# EAGLE board inktime_v6 (EAGLE 9.7.0)
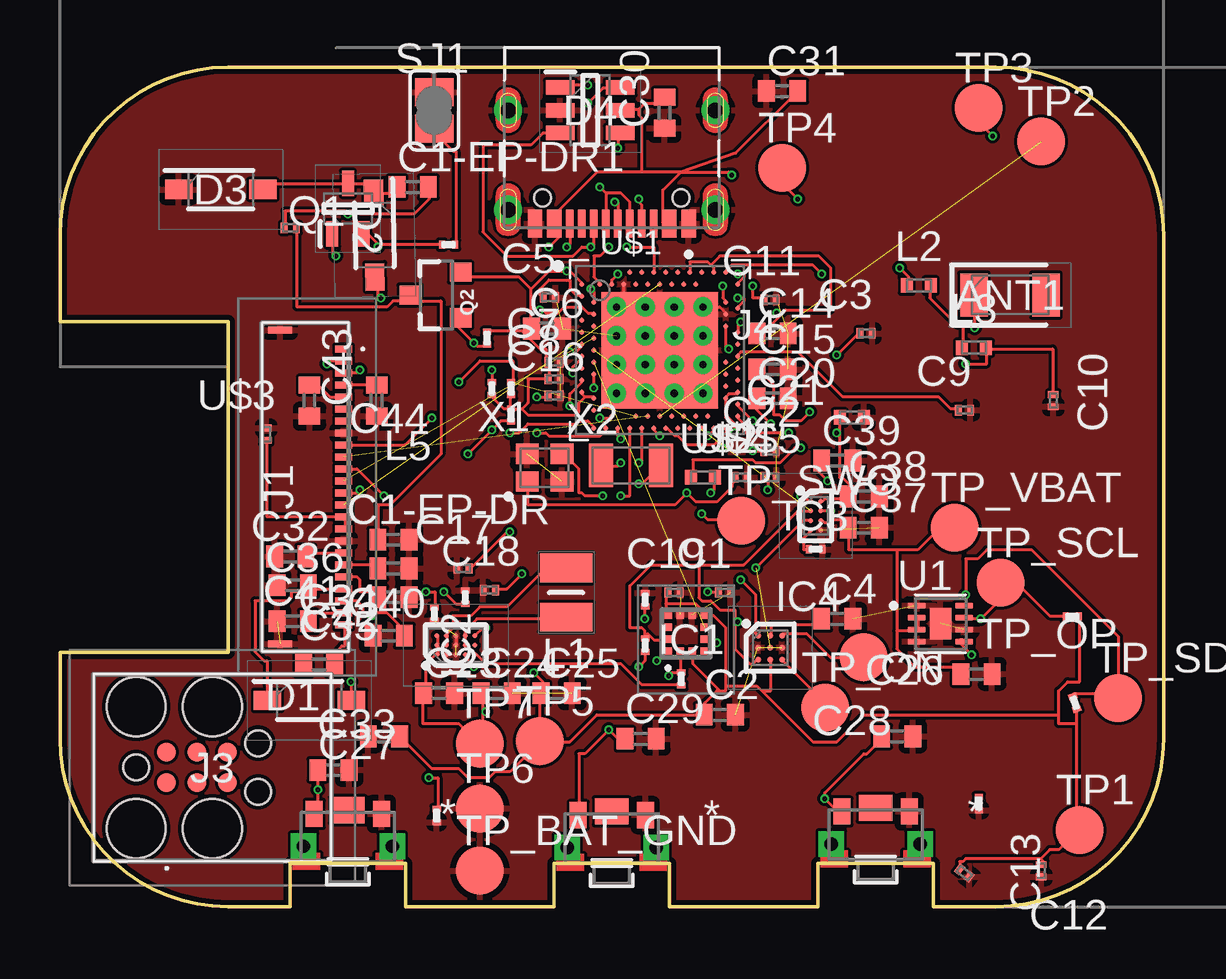
[diagram p0: board, top side]
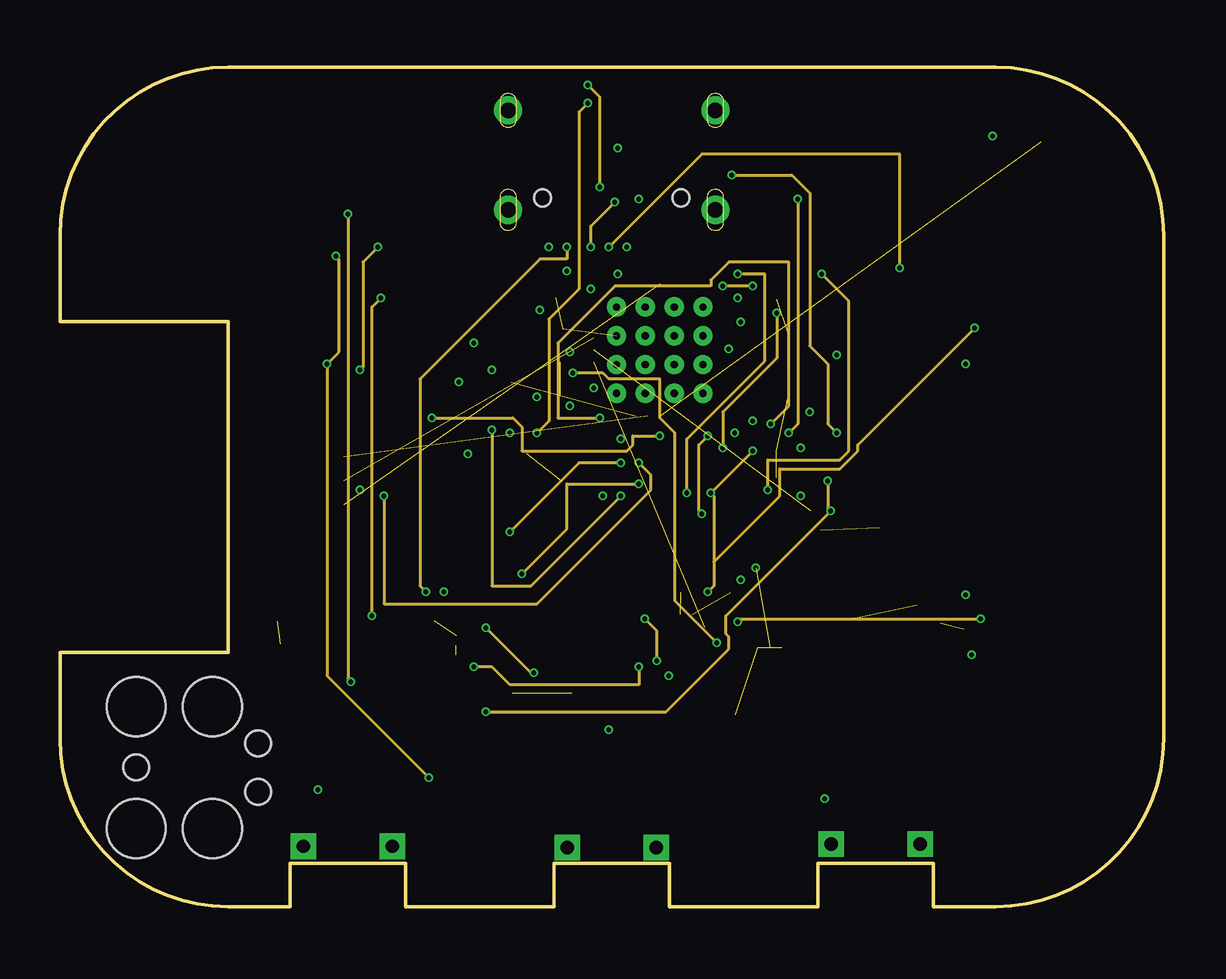
[diagram p1: board, inner layer Route2]
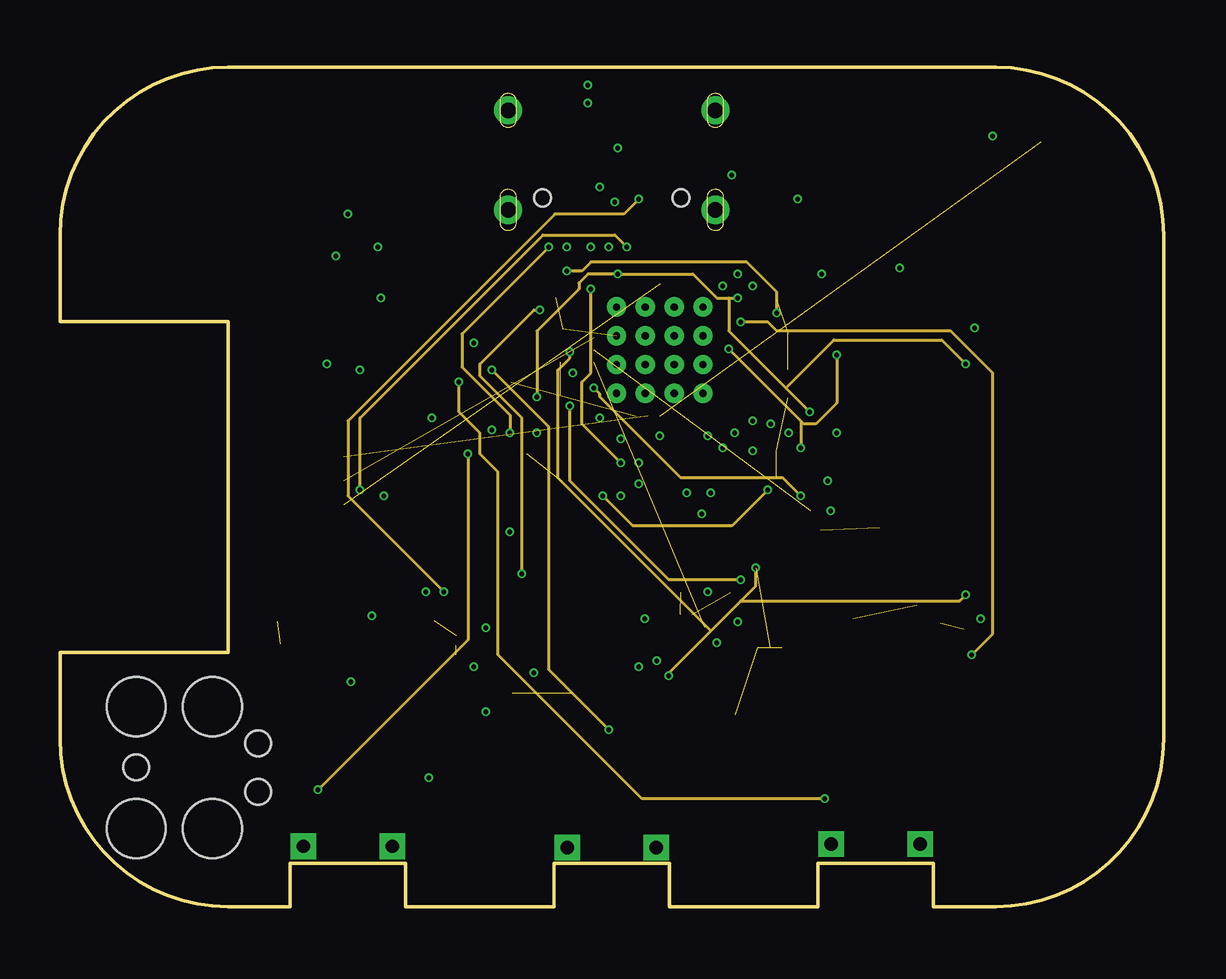
[diagram p2: board, inner layer Route15]
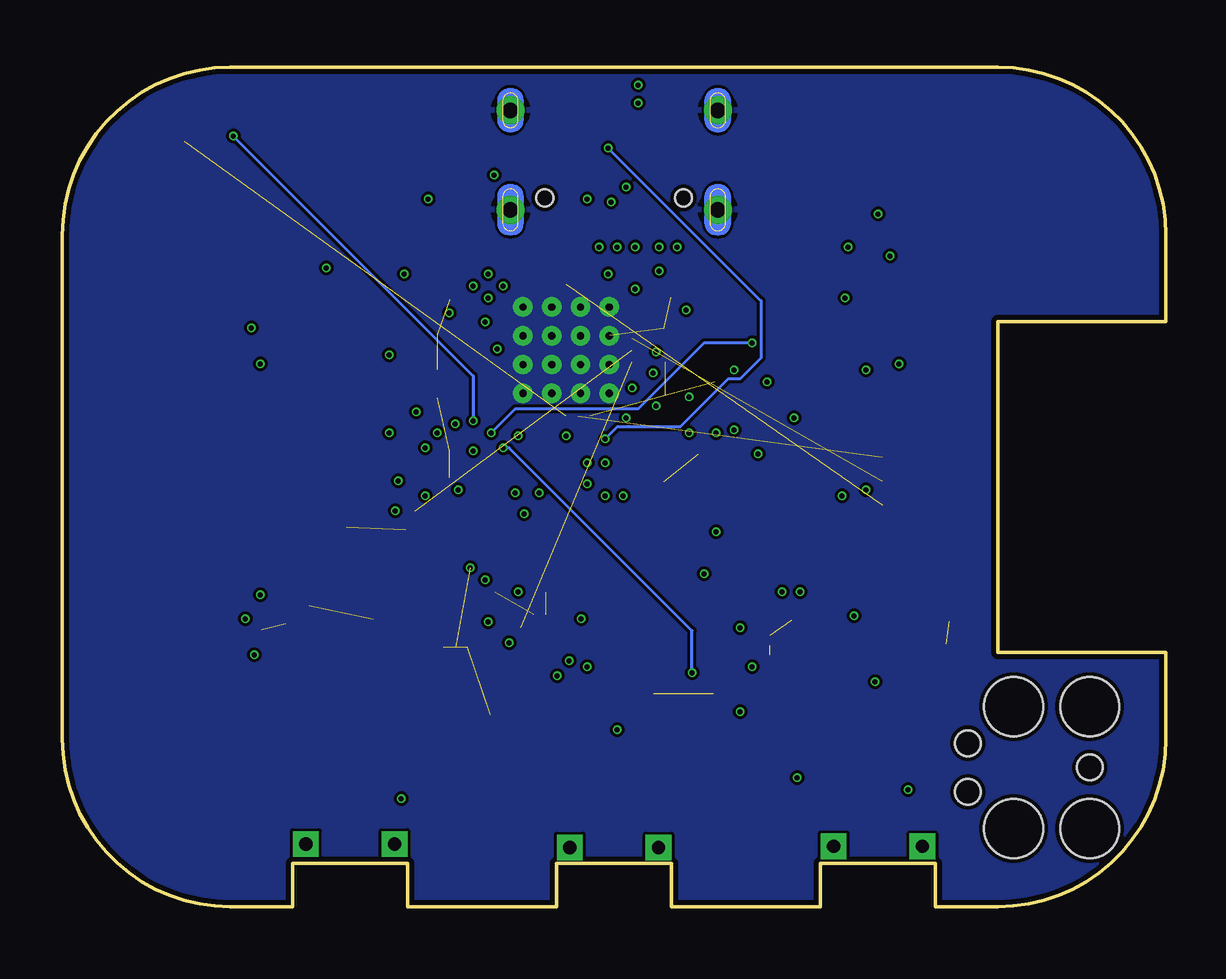
[diagram p3: board, bottom side, seen from below]

Size 46 x 35 mm. Coordinates in mm from the lower left corner, seen from the top.
Outline: 39,0 36.4,0 36.4,1.8 31.6,1.8 31.6,0 25.4,0 25.4,1.8 20.6,1.8 20.6,0 14.4,0 14.4,1.8 9.6,1.8 9.6,0 7,0 arc-90 0,7 0,10.6 7,10.6 7,24.4 0,24.4 0,28 arc-90 7,35 39,35 arc-90 46,28 46,7 arc-90 39,0
Copper layers (1+2*15+16): Top 0.035mm / dielectric 1.6mm / Route2 0.035mm / dielectric 0.15mm / Route15 0.035mm / dielectric 0.2mm / Bottom 0.035mm
Design rules "jlcpcb-2layers.dru *": minimum track width 5mil, minimum drill 0.2mm, track to track 5mil, track to pad 5mil, pad to pad 5mil, via to via 5mil, smd to smd 5mil, copper to edge 0.2mm, drill to drill 6mil, minimum pad ring 10mil, minimum via ring 3mil, stop-mask expansion 4mil, vias tented up to drill 999mm, thermal gap 10mil

## Footprints (pad centres in the part's own frame; a part is rotated, then mirrored left to right if it is on the bottom)
2450AT18B100E_ANTC3216X140N = smd 1.15 x 1.8: 1 -1.5,0; 2 1.5,0
NORDIC_NRF_3_RESC0201_L = smd 0.28 x 0.43: 1 -0.255,0; 2 0.255,0
ESP32_C6_LIBRARY_1_ESP32_WROVER_EAGLE-LTSPICE_C0402 = smd 0.7 x 0.9: 1 -0.65,0; 2 0.65,0
NORDIC_NRF_3_RESC0402_L = smd 0.5 x 0.6: 1 -0.5,0; 2 0.5,0
ESP32_C6_LIBRARY_5_SOD3716X135N = smd 1.15 x 0.8: 1 -1.75,0; 2 1.75,0
ESP32_C6_LIBRARY_3_SOT95P280X145-6N = smd 1.2 x 0.6: 1 -1.25,0.95; 2 -1.25,0; 3 -1.25,-0.95; 4 1.25,-0.95; 5 1.25,0; 6 1.25,0.95
BMA423_BMA423 = smd 0.3 x 0.35: 1 -0.75,-0.775; 2 -0.25,-0.775; 3 0.25,-0.775; 4 0.75,-0.775; 7 0.75,0.775; 8 0.25,0.775; 9 -0.25,0.775; 10 -0.75,0.775 | smd 0.35 x 0.3: 5 0.775,-0.25; 6 0.775,0.25; 11 -0.775,0.25; 12 -0.775,-0.25
RT6160AWSC_BGA15C40P3X5_140X230X60 = smd 0.216 x 0.216: A1 -0.4,0.8; A2 0,0.8; A3 0.4,0.8; B1 -0.4,0.4; B2 0,0.4; B3 0.4,0.4; C1 -0.4,0; C2 0,0; C3 0.4,0; D1 -0.4,-0.4; D2 0,-0.4; D3 0.4,-0.4; E1 -0.4,-0.8; E2 0,-0.8; E3 0.4,-0.8
BQ25180YBGR_BGA8C40P2X4_100X155X50 = smd 0.2 x 0.2: A1 -0.2,0.6; A2 0.2,0.6; B1 -0.2,0.2; B2 0.2,0.2; C1 -0.2,-0.2; C2 0.2,-0.2; D1 -0.2,-0.6; D2 0.2,-0.6
DRV2605YZFR_BGA9C50P3X3_144X144X62 = smd 0.25 x 0.25: A1 -0.5,0.5; A2 0,0.5; A3 0.5,0.5; B1 -0.5,0; B2 0,0; B3 0.5,0; C1 -0.5,-0.5; C2 0,-0.5; C3 0.5,-0.5
503480-2400_5034802400 = smd 0.3 x 0.7: 1 -5.75,1.525; 2 -5.25,1.525; 3 -4.75,1.525; 4 -4.25,1.525; 5 -3.75,1.525; 6 -3.25,1.525; 7 -2.75,1.525; 8 -2.25,1.525; 9 -1.75,1.525; 10 -1.25,1.525; 11 -0.75,1.525; 12 -0.25,1.525; 13 0.25,1.525; 14 0.75,1.525; 15 1.25,1.525; 16 1.75,1.525; 17 2.25,1.525; 18 2.75,1.525; 19 3.25,1.525; 20 3.75,1.525; 21 4.25,1.525; 22 4.75,1.525; 23 5.25,1.525; 24 5.75,1.525 | smd 0.3 x 1: MP1 -6.54,-1.125; MP2 6.54,-1.125
TC2030-IDC_TC2030IDC = smd 0.783 x 0.783: 1 -0.953,-0.635; 2 -0.953,0.635; 3 0.317,-0.635; 4 0.317,0.635; 5 1.588,-0.635; 6 1.588,0.635 | hole 2.451: -2.223,-2.54; -2.223,2.54; 0.952,-2.54; 0.952,2.54 | hole 1.067: -2.223,0; 2.857,-1.016; 2.857,1.016
KH-TYPE-C-16P_KINGHELM_KH-TYPE-C-16P = smd 0.6 x 1.15: A1_B12 -3.2,4.725; A4_B9 -2.4,4.725; A9_B4 2.4,4.725; A12_B1 3.2,4.725 | smd 0.3 x 1.15: A5 -1.25,4.725; A6 -0.25,4.725; A7 0.25,4.725; A8 1.25,4.725; B5 1.75,4.725; B6 0.75,4.725; B7 -0.75,4.725; B8 -1.75,4.725 | drill 0.65 pad 1.05: SH1 -4.32,0; SH2 4.32,0; SH3 -4.32,4.15; SH4 4.32,4.15 | hole 0.7: -2.89,3.65; 2.89,3.65
MLP2016SR47MT0S1_INDC2016X100N = smd 1.2 x 2.2: 1 -1.028,0; 2 1.028,0
NORDIC_NRF_2_RESC0402_L = smd 0.5 x 0.6: 1 -0.5,0; 2 0.5,0
NORDIC_NRF_2_RESC0201_L = smd 0.28 x 0.43: 1 -0.255,0; 2 0.255,0
ESP32_C6_LIBRARY_6_SOT65P210X110-3N = smd 1.05 x 0.5: 1 -1.05,0.65; 2 -1.05,-0.65; 3 1.05,0
ESP32_C6_LIBRARY_4_ESP32_C6_LIBRARY_4_ESP32_C6_LIBRARY_4_ESP32_C6_LIBRARY_4_ESP32_WROVER_SPARKFUN-DISCRETESEMI_SOT23-3 = smd 0.8 x 0.9: 1 -0.95,-1; 2 0.95,-1; 3 0,1.1
CPF0201D7K68C1_0201 = smd 0.35 x 0.25: 1 0,0.275; 2 0,-0.275
ESP32_C6_LIBRARY_7_JUMPER_SJ = smd 1.168 x 1.6: 1 -0.762,0; 2 0.762,0
2025-10-22_07-23-44_LIBRARY_SW_EVP-AKE31A_PAN = smd 0.711 x 1.092: 1 -1.4,-0.972; 2 1.4,-0.972 | drill 0.559 pad 0.914 square: 3 -1.848,0.381; 4 1.848,0.381 | smd 1.397 x 1.092: 5 0,-1.124
HECTOR_WATCH_1_TP20R = smd 2 x 2: TP 0,0
ESP32_C6_LIBRARY_SON50P200X200X80-9N = smd 0.76 x 0.27: 1 -0.985,0.75; 2 -0.985,0.25; 3 -0.985,-0.25; 4 -0.985,-0.75; 5 0.985,-0.75; 6 0.985,-0.25; 7 0.985,0.25; 8 0.985,0.75 | smd 0.9 x 1.3: 9 0,0
NORDIC_NRF_4_AQFN50P700X700X85_HS-74N = smd 4.85 x 4.85: P$74 0,0 | drill 0.3 pad 0.6: P$75 -1.8,1.8; P$76 -0.6,1.8; P$77 0.6,1.8; P$78 1.8,1.8; P$79 -1.8,0.6; P$80 -0.6,0.6; P$81 0.6,0.6; P$82 1.8,0.6; P$83 -1.8,-0.6; P$84 -0.6,-0.6; P$85 0.6,-0.6; P$86 1.8,-0.6; P$87 -1.8,-1.8; P$88 -0.6,-1.8; P$89 0.6,-1.8; P$90 1.8,-1.8 | smd 0.2 x 0.2: P$A8 -1.25,3.25; P$A10 -0.75,3.25; P$A12 -0.25,3.25; P$A14 0.25,3.25; P$A16 0.75,3.25; P$A18 1.25,3.25; P$A20 1.75,3.25; P$A22 2.25,3.25; P$A23 2.75,3.25; P$AA24 3.25,-2.25; P$AB2 -2.75,-2.5; P$AC5 -2,-2.75; P$AC9 -1,-2.75; P$AC11 -0.5,-2.75; P$AC13 0,-2.75; P$AC15 0.5,-2.75; P$AC17 1,-2.75; P$AC19 1.5,-2.75; P$AC21 2,-2.75; P$AC24 3.25,-2.75; P$AD2 -2.75,-3.25; P$AD4 -2.25,-3.25; P$AD6 -1.75,-3.25; P$AD8 -1.25,-3.25; P$AD10 -0.75,-3.25; P$AD12 -0.25,-3.25; P$AD14 0.25,-3.25; P$AD16 0.75,-3.25; P$AD18 1.25,-3.25; P$AD20 1.75,-3.25; P$AD22 2.25,-3.25; P$AD23 2.75,-3.25; P$B1 -3.25,2.75; P$B3 -2.5,2.75; P$B5 -2,2.75; P$B7 -1.5,2.75; P$B9 -1,2.75; P$B11 -0.5,2.75; P$B13 0,2.75; P$B15 0.5,2.75; P$B17 1,2.75; P$B19 1.5,2.75; P$B24 3.25,2.75; P$C1 -3.25,2.25; P$D2 -2.75,2; P$D23 2.75,2; P$E24 3.25,1.75; P$F2 -2.75,1.5; P$F23 2.75,1.5; P$G1 -3.25,1.25; P$H2 -2.75,1; P$H23 2.75,1; P$J1 -3.25,0.75; P$J24 3.25,0.75; P$K2 -2.75,0.5; P$L1 -3.25,0.25; P$L24 3.25,0.25; P$M2 -2.75,0; P$N1 -3.25,-0.25; P$N24 3.25,-0.25; P$P2 -2.75,-0.5; P$P23 2.75,-0.5; P$R1 -3.25,-0.75; P$R24 3.25,-0.75; P$T2 -2.75,-1; P$T23 2.75,-1; P$U1 -3.25,-1.25; P$U24 3.25,-1.25; P$V23 2.75,-1.5; P$W1 -3.25,-1.75; P$W24 3.25,-1.75; P$Y2 -2.75,-2; P$Y23 2.75,-2
NORDIC_NRF_BT-XTAL_2016_N = smd 0.95 x 0.85: 1 -0.725,-0.575; 2 0.725,-0.575; 3 0.725,0.575; 4 -0.725,0.575
NORDIC_NRF_1_XTAL_3215_N = smd 1 x 1.8: 1 -1.25,0; 2 1.25,0

## Placement (x,y rotation side)
ANT1  2450AT18B100E_2450AT18B100E  [2450AT18B100E_ANTC3216X140N]  39.6,25.5 0 top
C1  1pF  [NORDIC_NRF_3_RESC0201_L]  27.7,13.1 0 top
C1-EP-DR  10uF  [ESP32_C6_LIBRARY_1_ESP32_WROVER_EAGLE-LTSPICE_C0402]  13.9,15.3 0 top
C1-EP-DR1  4.7uF/25V  [ESP32_C6_LIBRARY_1_ESP32_WROVER_EAGLE-LTSPICE_C0402]  14.7,30 0 top
C2  0.1uF  [ESP32_C6_LIBRARY_1_ESP32_WROVER_EAGLE-LTSPICE_C0402]  27.5,8 0 top
C3  1pF  [NORDIC_NRF_3_RESC0201_L]  33.6,23.9 0 top
C4  1uF  [ESP32_C6_LIBRARY_1_ESP32_WROVER_EAGLE-LTSPICE_C0402]  32.4,12 0 top
C5  100nF  [NORDIC_NRF_3_RESC0201_L]  20.4,25.4 0 top
C6  4.7µF  [ESP32_C6_LIBRARY_1_ESP32_WROVER_EAGLE-LTSPICE_C0402]  20.3,24.1 0 top
C7  100nF  [NORDIC_NRF_3_RESC0201_L]  20.6,22.7 0 top
C8  100nF  [NORDIC_NRF_3_RESC0201_L]  20.6,22 0 top
C9  820pF  [NORDIC_NRF_3_RESC0201_L]  37.7,20.7 0 top
C10  N.C.  [NORDIC_NRF_3_RESC0201_L]  41.4,21.1 270 top
C11  100pF  [NORDIC_NRF_3_RESC0201_L]  29.6,25.3 0 top
C12  100nF  [NORDIC_NRF_3_RESC0201_L]  40.9,1.5 270 top
C13  N.C.  [NORDIC_NRF_3_RESC0201_L]  37.7,1.4 322.1 top
C14  4.7µF  [ESP32_C6_LIBRARY_1_ESP32_WROVER_EAGLE-LTSPICE_C0402]  29.7,23.9 0 top
C15  1.0µF  [ESP32_C6_LIBRARY_1_ESP32_WROVER_EAGLE-LTSPICE_C0402]  29.7,22.4 0 top
C16  47nF  [NORDIC_NRF_3_RESC0201_L]  20.6,21.3 0 top
C17  12pF  [NORDIC_NRF_3_RESC0201_L]  16.8,14.1 0 top
C18  12pF  [NORDIC_NRF_3_RESC0201_L]  17.9,13.2 0 top
C19  100nF  [NORDIC_NRF_3_RESC0201_L]  25.6,13.1 0 top
C20  4.7µF  [ESP32_C6_LIBRARY_1_ESP32_WROVER_EAGLE-LTSPICE_C0402]  29.7,21.2 0 top
C21  4.7µF  [NORDIC_NRF_3_RESC0402_L]  33,20.4 0 top
C22  N.C.  [NORDIC_NRF_3_RESC0201_L]  29.6,19 0 top
C23  0.1uF  [ESP32_C6_LIBRARY_1_ESP32_WROVER_EAGLE-LTSPICE_C0402]  15.8,8.9 0 top
C24  10uF  [ESP32_C6_LIBRARY_1_ESP32_WROVER_EAGLE-LTSPICE_C0402]  18.2,8.9 0 top
C25  22uF  [ESP32_C6_LIBRARY_1_ESP32_WROVER_EAGLE-LTSPICE_C0402]  20.7,8.9 0 top
C26  0.1uF  [ESP32_C6_LIBRARY_1_ESP32_WROVER_EAGLE-LTSPICE_C0402]  38.2,9.7 0 top
C27  1uF  [ESP32_C6_LIBRARY_1_ESP32_WROVER_EAGLE-LTSPICE_C0402]  11.4,5.7 0 top
C28  1uF  [ESP32_C6_LIBRARY_1_ESP32_WROVER_EAGLE-LTSPICE_C0402]  34.9,7.1 0 top
C29  1uF  [ESP32_C6_LIBRARY_1_ESP32_WROVER_EAGLE-LTSPICE_C0402]  24.2,7 0 top
C30  4.7uF  [ESP32_C6_LIBRARY_1_ESP32_WROVER_EAGLE-LTSPICE_C0402]  25.2,33.1 90 top
C31  0.1uF  [ESP32_C6_LIBRARY_1_ESP32_WROVER_EAGLE-LTSPICE_C0402]  30.1,34 0 top
C32  1uF/50V  [ESP32_C6_LIBRARY_1_ESP32_WROVER_EAGLE-LTSPICE_C0402]  9.6,14.6 0 top
C33  22uF  [ESP32_C6_LIBRARY_1_ESP32_WROVER_EAGLE-LTSPICE_C0402]  13.5,7.1 180 top
C34  1uF/50V  [ESP32_C6_LIBRARY_1_ESP32_WROVER_EAGLE-LTSPICE_C0402]  13.9,14.1 180 top
C35  1uF/50V  [ESP32_C6_LIBRARY_1_ESP32_WROVER_EAGLE-LTSPICE_C0402]  13.9,12.9 180 top
C36  1uF/50V  [ESP32_C6_LIBRARY_1_ESP32_WROVER_EAGLE-LTSPICE_C0402]  9.7,13.4 0 top
C37  1uF  [ESP32_C6_LIBRARY_1_ESP32_WROVER_EAGLE-LTSPICE_C0402]  33.5,15.8 0 top
C38  1uF  [ESP32_C6_LIBRARY_1_ESP32_WROVER_EAGLE-LTSPICE_C0402]  33.5,17.1 0 top
C39  10uF  [ESP32_C6_LIBRARY_1_ESP32_WROVER_EAGLE-LTSPICE_C0402]  32.4,18.6 0 top
C40  1uF/50V  [ESP32_C6_LIBRARY_1_ESP32_WROVER_EAGLE-LTSPICE_C0402]  13.7,11.3 0 top
C41  1uF/50V  [ESP32_C6_LIBRARY_1_ESP32_WROVER_EAGLE-LTSPICE_C0402]  9.7,11.9 0 top
C42  1uF/50V  [ESP32_C6_LIBRARY_1_ESP32_WROVER_EAGLE-LTSPICE_C0402]  10.8,10.1 0 top
C43  1uF/50V  [ESP32_C6_LIBRARY_1_ESP32_WROVER_EAGLE-LTSPICE_C0402]  13.2,21.1 90 top
C44  1uF/50V  [ESP32_C6_LIBRARY_1_ESP32_WROVER_EAGLE-LTSPICE_C0402]  10.4,21.1 90 top
D1  ESP32_C6_LIBRARY_5_MBR0530  [ESP32_C6_LIBRARY_5_SOD3716X135N]  10.4,8.6 0 top
D2  ESP32_C6_LIBRARY_5_MBR0530  [ESP32_C6_LIBRARY_5_SOD3716X135N]  13.1,28 271 top
D3  ESP32_C6_LIBRARY_5_MBR0530  [ESP32_C6_LIBRARY_5_SOD3716X135N]  6.7,29.9 0 top
D4  ESP32_C6_LIBRARY_3_USBLC6-2SC6Y  [ESP32_C6_LIBRARY_3_SOT95P280X145-6N]  22.1,33.2 0 top
IC1  BMA423_BMA423  [BMA423_BMA423]  26.1,11.4 0 top
IC2  RT6160AWSC_RT6160AWSC  [RT6160AWSC_BGA15C40P3X5_140X230X60]  16.5,10.9 90 top
IC3  BQ25180YBGR_BQ25180YBGR  [BQ25180YBGR_BGA8C40P2X4_100X155X50]  31.5,16.3 0 top
IC4  DRV2605YZFR_DRV2605YZFR  [DRV2605YZFR_BGA9C50P3X3_144X144X62]  29.6,10.8 0 top
J1  503480-2400_503480-2400  [503480-2400_5034802400]  10.3,17.5 270 top
J3  TC2030-IDC_TC2030-IDC  [TC2030-IDC_TC2030IDC]  5.4,5.8 0 top
J4  KH-TYPE-C-16P_KH-TYPE-C-16P  [KH-TYPE-C-16P_KINGHELM_KH-TYPE-C-16P]  23,33.2 180 top
L1  MLP2016SR47MT0S1_FTC252012SR47MBCA  [MLP2016SR47MT0S1_INDC2016X100N]  21.1,13.1 270 top
L2  10µH  [NORDIC_NRF_2_RESC0402_L]  35.8,25.9 0 top
L3  10µH  [NORDIC_NRF_2_RESC0402_L]  38.1,23.3 0 top
L5  68uH  [NORDIC_NRF_2_RESC0201_L]  9.6,28.3 180 top
Q1  ESP32_C6_LIBRARY_6_SI1308EDL-T1-GE3  [ESP32_C6_LIBRARY_6_SOT65P210X110-3N]  12,29.1 90 top
Q2  20V/4.2A/52mΩ/1.4W  [ESP32_C6_LIBRARY_4_ESP32_C6_LIBRARY_4_ESP32_C6_LIBRARY_4_ESP32_C6_LIBRARY_4_ESP32_WROVER_SPARKFUN-DISCRETESEMI_SOT23-3]  15.7,25.5 90 top
R1  0  [CPF0201D7K68C1_0201]  25.9,9.5 0 top
R2  0  [CPF0201D7K68C1_0201]  24.4,10.9 0 top
R3  0  [CPF0201D7K68C1_0201]  24.4,12.8 0 top
R4  3K3  [CPF0201D7K68C1_0201]  42.2,12.1 270 top
R5  3K3  [CPF0201D7K68C1_0201]  42.3,8.5 198.5 top
R6  0.47  [CPF0201D7K68C1_0201]  16.2,27.6 270 top
R7  2.2  [CPF0201D7K68C1_0201]  38.3,4.3 180 top
R8  10K  [CPF0201D7K68C1_0201]  15.7,3.8 180 top
R9  10K  [CPF0201D7K68C1_0201]  31.5,14.9 270 top
R10  10K  [CPF0201D7K68C1_0201]  18.8,20.5 180 top
R11  10K  [CPF0201D7K68C1_0201]  18.8,21.6 0 top
R12  10K  [CPF0201D7K68C1_0201]  18,21.6 0 top
R13  10K  [CPF0201D7K68C1_0201]  16.9,12.9 0 top
R14  10K  [CPF0201D7K68C1_0201]  15.6,12.2 0 top
R16  10K  [CPF0201D7K68C1_0201]  17.8,23.7 180 top
SJ1  0  [ESP32_C6_LIBRARY_7_JUMPER_SJ]  15.6,33.2 270 top
SW1  2025-10-22_07-23-44_LIBRARY_EVP-AKE31ASW_EVP-AKE31A_PAN  [2025-10-22_07-23-44_LIBRARY_SW_EVP-AKE31A_PAN]  12,2.9 180 top
SW2  2025-10-22_07-23-44_LIBRARY_EVP-AKE31ASW_EVP-AKE31A_PAN  [2025-10-22_07-23-44_LIBRARY_SW_EVP-AKE31A_PAN]  34,3 180 top
SW3  2025-10-22_07-23-44_LIBRARY_EVP-AKE31ASW_EVP-AKE31A_PAN  [2025-10-22_07-23-44_LIBRARY_SW_EVP-AKE31A_PAN]  23,2.85 180 top
TP1  HECTOR_WATCH_1_TPTP20R  [HECTOR_WATCH_1_TP20R]  42.5,3.2 0 top
TP2  HECTOR_WATCH_1_TPTP20R  [HECTOR_WATCH_1_TP20R]  40.9,31.9 0 top
TP3  HECTOR_WATCH_1_TPTP20R  [HECTOR_WATCH_1_TP20R]  38.3,33.3 0 top
TP4  HECTOR_WATCH_1_TPTP20R  [HECTOR_WATCH_1_TP20R]  30.1,30.8 0 top
TP5  HECTOR_WATCH_1_TPTP20R  [HECTOR_WATCH_1_TP20R]  20,6.9 0 top
TP6  HECTOR_WATCH_1_TPTP20R  [HECTOR_WATCH_1_TP20R]  17.5,4.1 0 top
TP7  HECTOR_WATCH_1_TPTP20R  [HECTOR_WATCH_1_TP20R]  17.5,6.8 0 top
TP_BAT_GND  HECTOR_WATCH_1_TPTP20R  [HECTOR_WATCH_1_TP20R]  17.5,1.5 0 top
TP_ON  HECTOR_WATCH_1_TPTP20R  [HECTOR_WATCH_1_TP20R]  31.9,8.3 0 top
TP_OP  HECTOR_WATCH_1_TPTP20R  [HECTOR_WATCH_1_TP20R]  33.5,10.4 0 top
TP_SCL  HECTOR_WATCH_1_TPTP20R  [HECTOR_WATCH_1_TP20R]  39.2,13.5 0 top
TP_SDA  HECTOR_WATCH_1_TPTP20R  [HECTOR_WATCH_1_TP20R]  44.1,8.7 0 top
TP_SWO  HECTOR_WATCH_1_TPTP20R  [HECTOR_WATCH_1_TP20R]  28.4,16.1 0 top
TP_VBAT  HECTOR_WATCH_1_TPTP20R  [HECTOR_WATCH_1_TP20R]  37.3,15.8 0 top
U1  ESP32_C6_LIBRARY_MAX17048G+T10  [ESP32_C6_LIBRARY_SON50P200X200X80-9N]  36.7,11.8 0 top
U$1  NORDIC_NRF_4_NRF52840_QF  [NORDIC_NRF_4_AQFN50P700X700X85_HS-74N]  25,23.2 0 top
U$2  3.9nH  [NORDIC_NRF_2_RESC0402_L]  26.8,17.9 0 top
U$3  1uF/50V  [NORDIC_NRF_3_RESC0201_L]  8.6,19.7 270 top
U$4  12pF  [NORDIC_NRF_3_RESC0201_L]  28.4,17.9 0 top
U$5  12pF  [NORDIC_NRF_3_RESC0201_L]  29.6,17.9 0 top
X1  32MHz  [NORDIC_NRF_BT-XTAL_2016_N]  20.2,18.3 0 top
X2  32.768kHz  [NORDIC_NRF_1_XTAL_3215_N]  23.8,18.4 0 top

## Library data of the parts
ANT1 = dan-tudose-lib; ARROW_PART_NUMBER: 2450AT18B100E; ARROW_PRICE-STOCK: https://www.arrow.com/en/products/2450at18b100e/johanson-dielectrics?utm_currency=USD&region=nac; DESCRIPTION: Antennas 2.45GHz ANTENNA; HEIGHT: 1.4mm; MANUFACTURER_NAME: JOHANSON TECHNOLOGY; MANUFACTURER_PART_NUMBER: 2450AT18B100E; MOUSER_PART_NUMBER: 609-2450AT18B100E; MOUSER_PRICE-STOCK: https://www.mouser.co.uk/ProductDetail/Johanson-Technology/2450AT18B100E?qs=yCnrNFeXz%252Bh5MFsFIXGZGA%3D%3D
C1 C3 C5 C7-C13 C16-C19 C21 C22 L2 L3 L5 R1-R14 R16 SJ1 TP1-TP7 TP_BAT_GND TP_ON TP_OP TP_SCL TP_SDA TP_SWO TP_VBAT U$1-U$5 X1 X2 = dan-tudose-lib
C1-EP-DR C1-EP-DR1 C2 C4 C6 C14 C15 C20 C23-C44 = dan-tudose-lib; SPICEMODEL: NONE; SPICEPREFIX: C
D1-D3 = dan-tudose-lib; AVAILABILITY: In Stock; CHECK_PRICES: https://www.snapeda.com/parts/MBR0530/Onsemi/view-part/?ref=eda; DESCRIPTION: Diode Schottky 30 V 500mA Surface Mount SOD-123; MF: ON Semiconductor; MP: MBR0530; PACKAGE: SOD-123-2 ON Semiconductor; PRICE: None; PURCHASE-URL: https://www.snapeda.com/api/url_track_click_mouser/?unipart_id=179458&manufacturer=ON Semiconductor&part_name=MBR0530&search_term=None; SNAPEDA_LINK: https://www.snapeda.com/parts/MBR0530/Onsemi/view-part/?ref=snap
D4 = dan-tudose-lib; AVAILABILITY: In Stock; CHECK_PRICES: https://www.snapeda.com/parts/USBLC6-2SC6Y/STMicroelectronics/view-part/?ref=eda; DESCRIPTION: 17V Clamp 5A (8/20µs) Ipp Tvs Diode Surface Mount SOT-23-6; MF: STMicroelectronics; MP: USBLC6-2SC6Y; PACKAGE: SOT-23-6 STMicroelectronics; PRICE: None; SNAPEDA_LINK: https://www.snapeda.com/parts/USBLC6-2SC6Y/STMicroelectronics/view-part/?ref=snap
IC1 = dan-tudose-lib; ARROW_PART_NUMBER: BMA423; ARROW_PRICE-STOCK: https://www.arrow.com/en/products/bma423/bosch; DESCRIPTION: Accelerometers Triaxial low-g 12bit Acceleration Sensor; HEIGHT: 1mm; MANUFACTURER_NAME: BOSCH; MANUFACTURER_PART_NUMBER: BMA423; MOUSER_PART_NUMBER: 262-BMA423; MOUSER_PRICE-STOCK: https://www.mouser.co.uk/ProductDetail/Bosch-Sensortec/BMA423?qs=HXFqYaX1Q2xC%252BSgeGoX3mg%3D%3D
IC2 = dan-tudose-lib; DESCRIPTION: Buck-Boost Regulator Positive Output Step-Up/Step-Down I2C DC-DC Controller IC 15-WL-CSP (BSC) (1.4x2.3); HEIGHT: 0.6mm; MANUFACTURER_NAME: RICHTEK; MANUFACTURER_PART_NUMBER: RT6160AWSC; MOUSER_PART_NUMBER: 835-RT6160AWSC; MOUSER_PRICE-STOCK: https://www.mouser.co.uk/ProductDetail/Richtek/RT6160AWSC?qs=amGC7iS6iy%2FLd9PSoixZXQ%3D%3D
IC3 = dan-tudose-lib; ARROW_PART_NUMBER: BQ25180YBGR; ARROW_PRICE-STOCK: https://www.arrow.com/en/products/bq25180ybgr/texas-instruments?utm_currency=USD&region=nac; DESCRIPTION: Charger IC Lithium Ion/Polymer, Lithium Iron Phosphate 8-DSBGA (1.6x1.1); HEIGHT: 0.5mm; MANUFACTURER_NAME: Texas Instruments; MANUFACTURER_PART_NUMBER: BQ25180YBGR; MOUSER_PART_NUMBER: 595-BQ25180YBGR; MOUSER_PRICE-STOCK: https://www.mouser.co.uk/ProductDetail/Texas-Instruments/BQ25180YBGR?qs=doiCPypUmgEWjAK%252BJAX6Tw%3D%3D
IC4 = dan-tudose-lib; ARROW_PART_NUMBER: DRV2605YZFR; ARROW_PRICE-STOCK: https://www.arrow.com/en/products/drv2605yzfr/texas-instruments?region=nac; DESCRIPTION: Haptic Driver for ERM/LRA with Built-In Library and Smart Loop Architecture; HEIGHT: 0.625mm; MANUFACTURER_NAME: Texas Instruments; MANUFACTURER_PART_NUMBER: DRV2605YZFR
J1 = dan-tudose-lib; DESCRIPTION: FFC & FPC Connectors 0.5mm FPC RA SMT Dual Contact 24Ckt; HEIGHT: 1.87mm; MANUFACTURER_NAME: Molex; MANUFACTURER_PART_NUMBER: 503480-2400; MOUSER_PART_NUMBER: 538-503480-2400; MOUSER_PRICE-STOCK: https://www.mouser.co.uk/ProductDetail/Molex/503480-2400?qs=OAhjpuo3Vu7efIoxFh9AOw%3D%3D
J3 = dan-tudose-lib; DESCRIPTION: CABLE ADAPTER 6 POS; HEIGHT: 19mm; MANUFACTURER_NAME: Tag Connect; MANUFACTURER_PART_NUMBER: TC2030-IDC
J4 = dan-tudose-lib; AVAILABILITY: Not in stock; CHECK_PRICES: https://www.snapeda.com/parts/KH-TYPE-C-16P/Kinghelm/view-part/?ref=eda; MF: kinghelm; MP: KH-TYPE-C-16P; PACKAGE: None; PRICE: None; SNAPEDA_LINK: https://www.snapeda.com/parts/KH-TYPE-C-16P/Kinghelm/view-part/?ref=snap
L1 = dan-tudose-lib; DESCRIPTION: SMD / SMT Inductors (Coils), L=0.47?H, L x W x T :; HEIGHT: 1mm; JLCPCB: https://jlcpcb.com/partdetail/6763488-FTC252012SR47MBCA/C5832368; MANUFACTURER_NAME: TDK; MANUFACTURER_PART_NUMBER: FTC252012SR47MBCA
Q1 = dan-tudose-lib; AVAILABILITY: In Stock; CHECK_PRICES: https://www.snapeda.com/parts/SI1308EDL-T1-GE3/Vishay+Siliconix/view-part/?ref=eda; DESCRIPTION: Si1308EDL-T1-GE3 N-channel MOSFET Transistor, 1.5 A, 30 V, 3-Pin SC-70 | Siliconix / Vishay SI1308EDL-T1-GE3; MF: Vishay Siliconix; MP: SI1308EDL-T1-GE3; PACKAGE: SOT-323 Vishay Semiconductor; PRICE: None; PURCHASE-URL: https://www.snapeda.com/api/url_track_click_mouser/?unipart_id=274603&manufacturer=Vishay Siliconix&part_name=SI1308EDL-T1-GE3&search_term=None; SNAPEDA_LINK: https://www.snapeda.com/parts/SI1308EDL-T1-GE3/Vishay+Siliconix/view-part/?ref=snap
Q2 = dan-tudose-lib; PROD_ID: TRAN-14388
SW1-SW3 = dan-tudose-lib; COPYRIGHT: Copyright (C) 2025 Ultra Librarian. All rights reserved.; DIGI-KEY_PART_NUMBER_1: P123437TR-ND; DIGI-KEY_PART_NUMBER_2: P123437CT-ND; DIGI-KEY_PART_NUMBER_3: P123437DKR-ND; MANUFACTURER_NAME: Panasonic; MANUFACTURER_PART_NUMBER: EVP-AKE31A
U1 = dan-tudose-lib; AVAILABILITY: In Stock; CHECK_PRICES: https://www.snapeda.com/parts/MAX17048G+T10/Analog+Devices/view-part/?ref=eda; DESCRIPTION: 3µA 1-Cell/2-Cell Fuel Gauge with ModelGauge; MF: Analog Devices; MP: MAX17048G+T10; PACKAGE: TDFN-8 Maxim; PRICE: None; PURCHASE-URL: https://www.snapeda.com/api/url_track_click_mouser/?unipart_id=329239&manufacturer=Analog Devices&part_name=MAX17048G+T10&search_term=None; SNAPEDA_LINK: https://www.snapeda.com/parts/MAX17048G+T10/Analog+Devices/view-part/?ref=snap

## Nets
3V3: C2.1 C6.1 C7.1 C8.1 C12.1 C13.1 C14.1 C19.1 C25.1 C33.1 IC1.3 IC1.7 IC1.10 IC2.E3 IC4.C2 Q2.2 R4.1 R5.1 R10.2 R11.2 R12.2 R16.2 TP1.TP TP5.TP U$1.P$A18 U$1.P$A22 U$1.P$AD14 U$1.P$AD23 U$1.P$B1 U$1.P$W1 U$1.P$Y2
ALERT: U1.5 U$1.P$J24
D+: D4.4 U$1.P$AD6
D-: D4.6 U$1.P$AD4
DEC3: C11.1 U$1.P$D23
DEC4_6: C10.1 C15.1 C16.1 L3.2 U$1.P$B5 U$1.P$E24
DN: D4.1 J4.A7 J4.B7
DP: D4.3 J4.A6 J4.B6
EPD: J1.15 J1.16 U$3.2
EPD_3V3: C1-EP-DR.1 L5.1 Q2.3
EPD_BUSY: J1.9 U$1.P$AD12
EPD_CS: J1.12 U$1.P$K2
EPD_DC: J1.11 U$1.P$AD10
EPD_RST: J1.10 U$1.P$AC11
GDR: J1.2 Q1.1 R8.2
GND: C1-EP-DR.2 C1.2 C2.2 C3.2 C4.2 C5.2 C6.2 C7.2 C8.2 C9.2 C10.2 C11.2 C12.2 C13.2 C14.2 C15.2 C16.2 C17.1 C18.1 C19.2 C20.2 C21.2 C22.2 C23.2 C24.2 C25.2 C26.2 C27.2 C28.2 C29.2 C30.1 C31.1 C32.1 C33.2 C34.1 C35.1 C36.1 C37.2 C38.2 C39.2 C40.1 C41.1 C43.1 C44.1 D3.1 D4.2 IC1.8 IC1.9 IC2.B1 IC2.C1 IC2.C2 IC2.C3 IC3.D2 IC4.B1 IC4.B3 J1.8 J1.17 J1.MP1 J1.MP2 J4.A1_B12 J4.A12_B1 J4.SH1 J4.SH2 J4.SH3 J4.SH4 R3.1 R7.1 R8.1 R9.1 R13.1 R14.2 SJ1.1 SW1.1 SW2.1 SW3.1 TP6.TP TP_BAT_GND.TP U1.1 U1.4 U1.6 U1.9 U$1.P$74 U$1.P$75 U$1.P$76 U$1.P$77 U$1.P$78 U$1.P$79 U$1.P$80 U$1.P$81 U$1.P$82 U$1.P$83 U$1.P$84 U$1.P$85 U$1.P$86 U$1.P$87 U$1.P$88 U$1.P$89 U$1.P$90 U$1.P$B7 U$1.P$F23 U$3.1 U$4.2 U$5.2 X1.2 X1.4
GND3: IC1.1 R3.2
HAPTIC_EN: IC4.A1 U$1.P$U1
IMU_INT1: IC1.5 U$1.P$N1
IMU_INT2: IC1.6 U$1.P$P2
LX1: IC2.B2 IC2.B3 L1.1
LX2: IC2.D2 IC2.D3 L1.2
MOSI: J1.14 U$1.P$B13
N$1: C5.1 U$1.P$C1
N$3: C20.1 U$1.P$AC5
N$4: ANT1.1 C1.1 C22.1 U$2.2
N$5: C3.1 U$1.P$H23 U$2.1
N$6: L2.2 L3.1
N$7: U$1.P$A23 U$5.1 X1.3
N$10: IC2.D1 R2.2
N$11: C1-EP-DR1.2 D1.2 L5.2
N$12: IC2.E1 R1.2
N$13: C1-EP-DR1.1 D2.1 D3.2 Q1.3
N$14: C9.1 U$1.P$N24
N$16: IC3.D1 R9.2
N$21: U$1.P$B24 U$4.1 X1.1
N$22: R6.1 SJ1.2
N$24: L2.1 U$1.P$B3
N$30: C4.1 IC4.A2
N$45: J4.A5 R13.2
N$52: J4.B5 R14.1
N$59: C43.2 J1.4
N$60: C44.2 J1.5
N$70: C32.2 J1.18
N$71: C34.2 J1.19
N$72: C35.2 J1.20
N$76: C41.2 J1.23
N$78: C42.2 J1.24
OUT+: IC4.A3 TP_OP.TP
OUT-: IC4.C3 TP_ON.TP
P0.00/XL1: C17.2 U$1.P$D2 X2.1
P0.00/XL2: C18.2 U$1.P$F2 X2.2
P0.04: U$1.P$J1
P0.09: U$1.P$L24
P0.13: C27.1 R10.1 SW1.2 U$1.P$AD8
P0.14: C28.1 R11.1 SW2.2 U$1.P$AC9
P0.19: U$1.P$AC15
P0.20: U$1.P$AD16
P0.21: U$1.P$AC17
P0.22: U$1.P$AD18
P0.23: U$1.P$AC19
P0.24: U$1.P$AD20
P0.25: U$1.P$AC21
P0.26: U$1.P$G1
P0.27: U$1.P$H2
P0.28: U$1.P$B11
P0.29: U$1.P$A10
P0.30: U$1.P$B9
P0.31: U$1.P$A8
P1.01: Q2.1 R16.1 U$1.P$W24 U$1.P$Y23
P1.02: C29.1 R12.1 SW3.2
P1.03: U$1.P$V23
P1.04: U$1.P$U24
P1.05: U$1.P$T23
P1.06: U$1.P$R24
P1.07: U$1.P$P23
P1.09: U$1.P$R1
P1.10: U$1.P$A20
P1.11: U$1.P$B19
P1.12: U$1.P$B17
P1.13: U$1.P$A16
P1.14: U$1.P$B15
P1.15: U$1.P$A14
PMIC_INT: IC3.A1 U$1.P$T2
PREVGH: C36.2 D1.1 J1.21
PREVGL: C40.2 D2.2 J1.22
RESE: J1.3 Q1.2 R6.2
RESET: TP2.TP U$1.P$AC13
SCK: J1.13 U$1.P$A12
SCL: IC1.12 IC3.B1 IC4.C1 R2.1 R4.2 TP_SCL.TP U1.7 U$1.P$M2
SDA: IC1.2 IC3.C1 IC4.B2 R1.1 R5.2 TP_SDA.TP U1.8 U$1.P$L1
SWDCLK: TP3.TP U$1.P$AA24
SWDIO: TP4.TP U$1.P$AC24
SWO: TP_SWO.TP U$1.P$AD22
VBAT: C26.1 C37.1 IC3.C2 TP_VBAT.TP U1.2 U1.3
VBUS: C21.1 C30.2 C31.2 C38.1 D4.5 IC3.A2 J4.A4_B9 J4.A9_B4 U$1.P$AD2
VREG: C23.1 C24.1 C39.1 IC2.A1 IC2.A2 IC2.A3 IC3.B2 TP7.TP

## Tracks (layer width: path | path; a pad name or v marks a point on that pad's centre or on a via)
3V3  (via drill 0.2)
  Top 0.127: 21.88,21.25 21.75,21.38 U$1.P$W1 | 21.88,21.25 22.25,21.25 U$1.P$Y2 | R10.2 18.75,20.88 18.75,21.25 R11.2 | R12.2 18,21.25 18.5,20.75 18.75,20.75 R10.2 | 21.88,21.25 21.62,21 21.62,20.62 21.5,20.5 19.5,20.5 19.25,20.75 | 19.25,20.75 18.88,20.75 R10.2 | 19.62,25.75 20.38,26.5 v21.12,26.5 21.25,26.5 21.75,26 U$1.P$B1 | 19.62,25.75 19.62,24.12 C6.1 19.62,24 19.25,24 | 19.25,24 17.88,24 R16.2 | 19.25,24 20,23.25 20.25,23.25 20.25,22.75 C7.1 20.38,22.62 20.38,22 C8.1 19.5,22 19.5,21 19.25,20.75 | 19.62,25.75 19.12,26.25 16.88,26.25 16.75,26.38 Q2.2 | 27.38,19.38 27.75,19.75 U$1.P$AD23 | 27.38,19.38 27.25,19.25 26.12,19.25 25.75,19.62 25.62,19.62 25.25,20 U$1.P$AD14 | U$1.P$A18 26.25,26.88 27,26.88 27.12,26.75 | 27.12,26.75 27.25,26.62 U$1.P$A22 | 27.12,26.75 27.5,27.12 31.62,27.12 32.12,26.62 32.12,24.88 30.25,24.88 30,24.62 | 30,24.62 29.38,24 29.12,24 C14.1 | v27.62,19.12 27.38,19.38 | 30,24.62 v29.88,24.75 | 40.88,2 37.75,2 37.62,1.88 37.5,1.88 37.5,1.62 C13.1 | 40.88,2 41,1.88 C12.1 | 42.38,7.62 42.38,3.25 42.5,3.25 TP1.TP 42.5,3.12 42.38,3.12 41.62,2.38 41.25,2.38 40.88,2 | 42.38,7.62 42.38,8.12 R5.1 | 41.62,8 41.62,7.62 42.38,7.62 | 41.62,8 41.62,9 42,9.38 42.5,9.38 42.5,12 R4.1 | 25.25,12.62 25.25,13 C19.1 | 25.25,12.62 25.25,12.25 IC1.10 | 27.5,9 27.38,9 26.88,8.5 26.88,8 C2.1 22.38,8 21.25,6.88 20,6.88 | 27.5,9 27.75,9 27.75,9.2 | 27.75,9.2 29.05,9.2 29.25,9 | 29.25,9 29.62,9 29.62,10.25 IC4.C2 | 27.5,9 26.38,10.12 26.38,10.62 IC1.3 | 27.12,12.12 27.25,12.12 27.75,11.62 27.75,9.2 | 27.12,12.12 26.88,12.12 IC1.7 | 25.25,12.62 26.5,12.62 26.75,12.38 26.88,12.38 27.12,12.12 | IC2.E3 17.62,11.62 v17.75,11.62
  Top 0.127: v19.75,9.75 20.12,9.38 20.12,9 C25.1 20,8.88 TP5.TP 20,6.88 | C33.1 15.5,5.75 16.62,5.75 17,5.38 17.88,5.38 18.12,5.62 18.75,5.62 20,6.88 | 41.62,8 33.5,8 32.38,6.88 31.38,6.88 29.25,9
  Route2 0.127: v27.62,19.12 27.62,20.62 29.88,22.88 v29.88,24.75 | v17.75,11.62 19.62,9.75 v19.75,9.75
  Route15 0.127: v21.12,26.5 21.75,26.5 22.12,26.88 28.62,26.88 29.88,25.62 v29.88,24.75
  Bottom 0.127: v27.62,19.12 27.38,19.12 19.75,11.5 v19.75,9.75
ALERT  (via drill 0.2)
  Top 0.127: U$1.P$J24 28.25,24.38 v28.38,24.38 | v38,10.5 37.5,11 37.5,11.12 37.62,11.12 U1.5
  Route15 0.127: v28.38,24.38 29.5,24.38 29.88,24 37.12,24 38.88,22.25 38.88,11.38 v38,10.5
D+  (via drill 0.2)
  Top 0.127: U$1.P$AD6 23.25,19.62 v23.38,19.5 | v23.25,31.62 23.25,32.25 D4.4
  Bottom 0.127: v23.38,19.5 22.88,20 20.25,20 18.25,22 17.75,22 16.88,22.88 16.88,25.25 v23.25,31.62
D-  (via drill 0.2)
  Top 0.127: v19.88,19.75 20.25,19.75 20.38,19.62 22.5,19.62 22.75,19.88 U$1.P$AD4 | v22,33.5 22.62,34.12 23.25,34.12 D4.6
  Route2 0.127: v19.88,19.75 20.38,20.25 20.38,24.5 21.62,25.75 21.62,33.12 v22,33.5
DEC3  (via drill 0.2)
  Top 0.127: v27.62,25.88 27.62,25.38 27.75,25.25 U$1.P$D23 | v28.88,25.88 28.88,25.38 29.25,25.38 C11.1
  Route2 0.127: v28.88,25.88 v27.62,25.88
DEC4_6  (via drill 0.2)
  Top 0.127: 38.62,23.25 41.38,23.25 41.38,21.38 C10.1 | v28.25,25.38 28.5,25.38 28.5,25.25 28.25,25 U$1.P$E24 | v23.25,26.38 23,26.12 U$1.P$B5 | v19.88,21.25 20.25,21.25 C16.1 | v31.25,20.62 30.88,20.25 30.25,20.25 30,20.5 29.75,20.5 29.75,21.75 29.12,22.38 C15.1 | 38.62,23.25 38.62,22.62 v37.75,22.62 | 38.62,23.25 L3.2
  Route15 0.127: 27.88,25.38 27.38,25.38 26.38,26.38 v23.25,26.38 22,26.38 21.62,26 21.62,25.75 19.88,24 v19.88,21.25 | 27.88,25.38 v28.25,25.38 | 30.25,21.62 27.88,24 27.88,25.38 | 30.25,21.62 v31.25,20.62 | v37.75,22.62 36.75,23.62 32.25,23.62 30.25,21.62
DN  (via drill 0.2)
  Top 0.127: 22.75,29.75 J4.A7 | 22.75,29.75 23.38,29.75 23.75,29.38 J4.B7 | v22,34.25 20.88,34.25 D4.1 | 22.75,29.75 v22.5,30
  Route2 0.127: v22,34.25 22.5,33.75 v22.5,30
DP  (via drill 0.2)
  Top 0.127: J4.B6 22.25,27.5 v22.12,27.5 21.75,27.5 21.38,27.12 18.62,27.12 17.62,28.12 17.62,31.75 19.62,31.75 20.12,32.25 D4.3 | J4.A6 23.25,29.38 v23.12,29.38
  Route2 0.127: v23.12,29.38 22.12,28.38 v22.12,27.5
EPD
  Top 0.127: U$3.2 8.62,19.38 8.62,16.25 J1.15 11.88,16.25 11.88,15.75 J1.16
EPD_3V3
  Top 0.127: 14.25,25.25 13.88,25.25 13.62,25 9.88,25 9.88,28.25 L5.1 | 14.25,25.25 14.5,25.5 Q2.3 14.25,25.25 | C1-EP-DR.1 13.25,16.75 13.75,16.75 15.88,18.88 15.88,25.25 14.25,25.25
EPD_BUSY  (via drill 0.2)
  Top 0.127: v25,19.62 24.75,19.88 U$1.P$AD12 | v15.5,20.38 14.38,19.25 J1.9
  Route2 0.127: v25,19.62 23.88,19.62 23.88,19.25 23.62,19 19.25,19 19.25,20 18.88,20.38 v15.5,20.38
EPD_CS  (1 unrouted)
EPD_DC  (via drill 0.2)
  Top 0.127: U$1.P$AD10 24.25,18.5 v24.12,18.5 | v13.5,17.12 12.38,18.25 J1.11
  Route2 0.127: v24.12,18.5 24.62,18 24.62,17.38 19.88,12.62 13.5,12.62 v13.5,17.12
EPD_RST  (1 unrouted)
GDR  (via drill 0.2)
  Top 0.127: v15.38,5.38 15.75,5.38 15.75,4.12 R8.2 | v11.12,22.62 11.25,22.75 J1.2 | v11.5,27.12 11.38,27.12 11.38,28 Q1.1
  Route2 0.127: v15.38,5.38 11.12,9.62 v11.12,22.62 11.62,23.12 11.62,27 v11.5,27.12
GND  (20 unrouted)
  Top 0.127: IC2.C3 IC2.C2 | U$1.P$B7 23.5,25 23.25,25 U$1.P$74 26.88,25 | 26.88,25 27.5,25 27.75,24.75 U$1.P$F23 | 26.88,25 U$1.P$78
  pour Top: 20.56,1.86 20.58,1.88 25.42,1.88 25.44,1.86 25.46,1.84 25.48,1.82 25.48,0.08 31.52,0.08 31.52,1.82 31.54,1.84 31.56,1.86 31.58,1.88 36.42,1.88 36.44,1.86 36.46,1.84 36.48,1.82 36.48,0.08 39,0.08 39.78,0.12 40.54,0.25 41.29,0.46 42,0.76 42.68,1.14 43.32,1.59 43.9,2.1 44.41,2.68 44.86,3.32 45.24,4 45.54,4.71 45.75,5.46 45.88,6.22 45.92,7 45.92,28 45.88,28.78 45.75,29.54 45.54,30.29 45.24,31 44.86,31.68 44.41,32.32 43.9,32.9 43.32,33.41 42.68,33.86 42,34.24 41.29,34.54 40.54,34.75 39.78,34.88 39,34.92 7,34.92 6.22,34.88 5.46,34.75 4.71,34.54 4,34.24 3.32,33.86 2.68,33.41 2.1,32.9 1.59,32.32 1.14,31.68 0.76,31 0.46,30.29 0.25,29.54 0.12,28.78 0.08,28 0.08,24.48 7.02,24.48 7.04,24.46 7.06,24.44 7.08,24.42 7.08,10.58 7.06,10.56 7.04,10.54 7.02,10.52 0.08,10.52 0.08,7 0.12,6.22 0.25,5.46 0.46,4.71 0.76,4 1.14,3.32 1.59,2.68 2.1,2.1 2.68,1.59 3.32,1.14 4,0.76 4.71,0.46 5.46,0.25 6.22,0.12 7,0.08 9.52,0.08 9.52,1.82 9.54,1.84 9.56,1.86 9.58,1.88 14.42,1.88 14.44,1.86 14.46,1.84 14.48,1.82 14.48,0.08 20.52,0.08 20.52,1.82 20.54,1.84
  pour Bottom: 20.56,1.86 20.58,1.88 25.42,1.88 25.44,1.86 25.46,1.84 25.48,1.82 25.48,0.08 31.52,0.08 31.52,1.82 31.54,1.84 31.56,1.86 31.58,1.88 36.42,1.88 36.44,1.86 36.46,1.84 36.48,1.82 36.48,0.08 39,0.08 39.78,0.12 40.54,0.25 41.29,0.46 42,0.76 42.68,1.14 43.32,1.59 43.9,2.1 44.41,2.68 44.86,3.32 45.24,4 45.54,4.71 45.75,5.46 45.88,6.22 45.92,7 45.92,28 45.88,28.78 45.75,29.54 45.54,30.29 45.24,31 44.86,31.68 44.41,32.32 43.9,32.9 43.32,33.41 42.68,33.86 42,34.24 41.29,34.54 40.54,34.75 39.78,34.88 39,34.92 7,34.92 6.22,34.88 5.46,34.75 4.71,34.54 4,34.24 3.32,33.86 2.68,33.41 2.1,32.9 1.59,32.32 1.14,31.68 0.76,31 0.46,30.29 0.25,29.54 0.12,28.78 0.08,28 0.08,24.48 7.02,24.48 7.04,24.46 7.06,24.44 7.08,24.42 7.08,10.58 7.06,10.56 7.04,10.54 7.02,10.52 0.08,10.52 0.08,7 0.12,6.22 0.25,5.46 0.46,4.71 0.76,4 1.14,3.32 1.59,2.68 2.1,2.1 2.68,1.59 3.32,1.14 4,0.76 4.71,0.46 5.46,0.25 6.22,0.12 7,0.08 9.52,0.08 9.52,1.82 9.54,1.84 9.56,1.86 9.58,1.88 14.42,1.88 14.44,1.86 14.46,1.84 14.48,1.82 14.48,0.08 20.52,0.08 20.52,1.82 20.54,1.84
GND3  (via drill 0.2)
  Top 0.127: v24.38,12 24.38,12.5 R3.2 | v24.88,10.25 25.12,10.5 25.12,10.62 IC1.1
  Route2 0.127: v24.38,12 24.88,11.5 v24.88,10.25
HAPTIC_EN  (via drill 0.2)
  Top 0.127: v21.25,20.88 21.25,21.38 21.75,21.88 U$1.P$U1 | v28.38,13.62 29,13 29,11.38 IC4.A1
  Route15 0.127: v21.25,20.88 21.25,17.75 25.38,13.62 v28.38,13.62
IMU_INT1  (via drill 0.2)
  Top 0.127: v21.38,22.25 21.38,22.5 21.75,22.88 U$1.P$N1 | v27.38,11 27.25,11.12 26.88,11.12 IC1.5
  Route2 0.127: v21.38,22.25 22.62,22.25 22.88,22 25,22 25,20.38 25.62,19.75 25.62,12.75 v27.38,11
IMU_INT2  (1 unrouted)
LX1
  Top 0.127: IC2.B2 16.12,11 16.12,11.25 IC2.B3 16.12,11.38 16.38,11.62 16.38,12.12 17.12,12.12 17.5,12.5 18.62,12.5 20.25,14.12 21,14.12 L1.1
LX2
  Top 0.127: IC2.D2 16.88,11 16.88,11.25 IC2.D3 16.88,11.38 16.88,11.75 17.12,11.75 17.38,12 21,12 L1.2
MOSI  (1 unrouted)
N$1
  Top 0.127: U$1.P$C1 21.75,25.5 21.5,25.5 21.25,25.75 21.25,26.12 20.38,26.12 20,25.75 20,25.5 20.12,25.5 C5.1
N$3  (via drill 0.2)
  Top 0.127: v22.5,20.38 23,20.38 U$1.P$AC5 | v29.62,20.12 29,20.75 29,21.12 C20.1
  Route2 0.127: v22.5,20.38 20.75,20.38 20.75,23.5 23.12,25.88 27.12,25.88 27.12,26.12 27.88,26.88 30.38,26.88 30.38,20.88 v29.62,20.12
N$4  (via drill 0.2)
  Top 0.127: v27,13.12 27.38,13.12 C1.1 | v27.12,17.25 27.25,17.38 27.25,17.88 U$2.2 | v28.88,19 C22.1 | v38.12,24.12 38.12,25.5 ANT1.1
  Route2 0.127: v27,13.12 27.25,13.38 27.25,14.38 | 27.25,14.38 27.25,17.12 v27.12,17.25 v28.88,19 | v38.12,24.12 33.25,19.25 33.25,19 32.5,18.25 30,18.25 30,17.12 27.25,14.38
N$5  (via drill 0.2)
  Top 0.127: U$1.P$H23 27.75,23.25 v27.88,23.25 | v32.38,23 33.25,23.88 C3.1 | v30.88,19.12 30.62,19.12 30,18.5 29,18.5 28.88,18.62 26.38,18.62 26.38,18 U$2.1
  Route15 0.127: 30.88,20.25 31,20.12 31.5,20.12 32.38,21 v32.38,23 | 30.88,20.25 v27.88,23.25 | 30.88,20.25 v30.88,19.12
N$6
  Top 0.127: L3.1 37.62,23.38 37.62,24.25 37.38,24.25 36.25,25.38 36.25,25.88 L2.2
N$7  (via drill 0.2)
  Top 0.127: v31.75,26.38 31.38,26.75 28,26.75 27.75,26.5 U$1.P$A23 | v29.5,17.38 29.5,17.88 29.38,17.88 U$5.1 | v22.62,17.12 21.88,17.12 21.75,17.25 21.62,17.25 21.62,18.25 21,18.88 X1.3
  Route2 0.127: v31.75,26.38 32.88,25.25 32.88,19 32.5,18.62 29.5,18.62 v29.5,17.38
  Route15 0.127: v22.62,17.12 23.88,15.88 28,15.88 v29.5,17.38
N$10  (via drill 0.2)
  Top 0.127: v17.25,10 17,10 17,10.5 IC2.D1 | v24.12,10 24.38,10.25 24.38,10.62 R2.2
  Route2 0.127: v17.25,10 18,10 18.75,9.25 24.12,9.25 v24.12,10
N$11  (via drill 0.2)
  Top 0.127: 12,29 12.38,29 12.5,28.88 14.75,28.88 15.38,29.5 15.38,30 C1-EP-DR1.2 | 12,29 9.38,29 9.38,28.38 L5.2 | v12.12,9.38 12.12,8.62 D1.2 | 12,29 v12,28.88
  Route2 0.127: v12.12,9.38 12,9.5 v12,28.88
N$12
  Top 0.127: IC2.E1 17.38,10.5 17.75,10.12 23.38,10.12 24.25,9.25 25.88,9.25 R1.2
N$13
  Top 0.127: C1-EP-DR1.1 14,30 13.75,29.75 13.12,29.75 D2.1 13,29.75 12.62,30.12 12,30.12 | 12,30.12 8.62,30.12 8.5,30 D3.2 | 12,30.12 Q1.3
N$14
  Top 0.127: U$1.P$N24 28.25,23 28.38,23.12 30.75,23.12 32.62,21.25 36.62,21.25 37.12,20.75 37.38,20.75 C9.1
N$16
  Top 0.127: IC3.D1 31.25,15.62 31,15.38 31,14.88 31.12,14.88 R9.2
N$21  (via drill 0.2)
  Top 0.127: v28.25,26.38 28.5,26.38 28.5,26.25 28.25,26 U$1.P$B24 | U$4.1 28.25,17.88 28,17.62 28,17.5 27.38,16.88 26.5,16.88 v26.12,17.25 25.62,16.75 19.5,16.75 19.5,17.62 X1.1
  Route2 0.127: v28.25,26.38 29.38,26.38 29.38,22.75 26.12,19.5 v26.12,17.25
N$22
  Top 0.127: R6.1 16.5,27.62 16.5,31.5 16.38,31.5 15.5,32.38 SJ1.2
N$24  (via drill 0.2)
  Top 0.127: v22.88,27.5 22.5,27.12 22.25,27.12 22.25,26.25 22.5,26 U$1.P$B3 | v35,26.62 35.38,26.25 35.38,26 L2.1
  Route2 0.127: v22.88,27.5 26.75,31.38 35,31.38 v35,26.62
N$30
  Top 0.127: C4.1 31.5,11.75 29.62,11.75 29.62,11.38 IC4.A2
N$45  (via drill 0.2)
  Top 0.127: R13.2 16.5,12.62 v16,13.12 | v24.12,29.5 24.12,29.38 24.25,29.25 J4.A5
  Route15 0.127: v16,13.12 12,17.12 12,20.25 20.62,28.88 23.5,28.88 v24.12,29.5
N$52  (via drill 0.2)
  Top 0.127: v15.25,13.12 15.62,13.12 15.62,12.5 R14.1 | v21.12,27.5 21.25,27.62 J4.B5
  Route2 0.127: v15.25,13.12 15,13.38 15,22 20,27 21.12,27 v21.12,27.5
N$59
  Top 0.127: C43.2 J1.4
N$60
  Top 0.127: J1.5 11.25,21.25 10.75,21.75 C44.2
N$70
  Top 0.127: J1.18 10.38,14.75 10.25,14.62 C32.2
N$71
  Top 0.127: J1.19 13.12,14.25 13.25,14.12 C34.2
N$72
  Top 0.127: J1.20 12.38,13.75 12.5,13.62 12.5,13.12 13.12,13.12 13.25,13 C35.2
N$76
  Top 0.127: J1.23 10.62,12.25 10.38,12 C41.2
N$78
  Top 0.127: J1.24 11.88,11.75 11.88,10.88 11.75,10.88 11.38,10.5 11.38,10.12 C42.2
OUT+
  Top 0.127: IC4.A3 30.12,11.38 31.12,11.38 32.12,10.38 33.5,10.38 TP_OP.TP
OUT-
  Top 0.127: IC4.C3 30.12,10.25 32,8.38 TP_ON.TP
P0.00/XL1  (via drill 0.2)
  Top 0.127: U$1.P$D2 22.25,25.62 v22.12,25.75 | v23.38,18.5 23.25,18.38 22.62,18.38 X2.1 | v18.75,15.62 18.62,15.62 17.12,14.12 C17.2
  Route2 0.127: v18.75,15.62 21.62,18.5 v23.38,18.5
  Route15 0.127: v22.12,25.75 22.12,22.25 21.75,21.88 21.75,20.12 v23.38,18.5
P0.00/XL2  (via drill 0.2)
  Top 0.127: v20,24.88 20.12,24.88 20.25,24.75 20.75,24.75 21,25 21.75,25 22,24.75 22.25,24.75 U$1.P$F2 | v19.25,13.88 18.62,13.25 18.25,13.25 C18.2 | v24.12,17.62 24.25,17.62 25,18.38 X2.2
  Route2 0.127: v24.12,17.62 21.12,17.62 21.12,15.75 v19.25,13.88
  Route15 0.127: v20,24.88 19.75,24.88 17.5,22.62 17.5,22.12 19.25,20.38 v19.25,13.88
P0.13  (via drill 0.2)
  Top 0.127: C27.1 v10.75,4.88 10.75,3.88 10.62,3.88 SW1.2 | U$1.P$AD8 23.75,17.12 v23.38,17.12 | R10.1 18.75,20.25 18.38,20.25 v18,19.88 v17,18.88
  Route2 0.127: v23.38,17.12 19.62,13.38 18,13.38 v18,19.88
  Route15 0.127: v10.75,4.88 17,11.12 v17,18.88
P0.14  (via drill 0.2)  (1 unrouted)
  Top 0.127: v16.62,21.88 17.5,22.75 18.88,22.75 18.88,21.88 R11.1 | SW2.2 32.5,4 32.38,4 v31.88,4.5 31.88,4.75 33.5,6.38 33.62,6.38 34.25,7 C28.1
  Route15 0.127: v16.62,21.88 16.62,20.62 17.5,19.75 17.5,18.88 18.25,18.12 18.25,10.5 24.25,4.5 v31.88,4.5
P1.01  (via drill 0.2)
  Top 0.127: U$1.P$W24 28.25,21.38 27.88,21.38 27.75,21.25 U$1.P$Y23 27.75,20.38 27.88,20.38 28.12,20.12 v28.12,19.75 | R16.1 17.75,23.38 17.38,23.38 v17.25,23.5 16.62,24.12 16.62,24.5 Q2.1
  Bottom 0.127: v28.12,19.75 27.12,20.75 22,20.75 19.25,23.5 v17.25,23.5
P1.02  (via drill 0.2)
  Top 0.127: v18,22.38 R12.1 | C29.1 23.25,7 v22.88,7.38 21.88,6.38 21.62,6.38 21.62,3.88 SW3.2
  Route15 0.127: v18,22.38 20.38,20 20.38,9.88 v22.88,7.38
PMIC_INT  (via drill 0.2)
  Top 0.127: v22.25,21.62 U$1.P$T2 | v30.88,17.12 31,17 31.12,17 31.25,16.88 IC3.A1
  Route15 0.127: v22.25,21.62 22.5,21.38 22.5,21.25 25.88,17.88 30.12,17.88 v30.88,17.12
PREVGH
  Top 0.127: J1.21 10.5,13.25 C36.2 10.25,13.38 10,13.12 9.62,13.12 9.62,12.88 9.5,12.75 8.12,12.75 8.12,10.62 8.5,10.25 8.62,10.25 8.62,8.62 D1.1
PREVGL  (via drill 0.2)
  Top 0.127: J1.22 12.38,12.75 12.62,12.5 12.62,12.25 13,12.25 | 13,12.25 13.62,12.25 14.25,11.62 14.25,11.38 C40.2 | v13.38,25.38 13.25,25.38 13.25,26.25 D2.2 | 13,12.25 v13,12.12
  Route2 0.127: v13.38,25.38 13,25 v13,12.12
RESE  (via drill 0.2)
  Top 0.127: 13.25,27.62 15.88,27.62 R6.2 | 13.25,27.62 12.88,28 12.75,28 Q1.2 | J1.3 12.38,22.25 v12.5,22.38 | 13.25,27.62 v13.25,27.5
  Route2 0.127: v12.5,22.38 12.62,22.5 12.62,26.88 v13.25,27.5
RESET  (1 unrouted)
SCK  (via drill 0.2)
  Top 0.127: U$1.P$A12 24.75,27.5 v23.62,27.5 | v12.5,17.38 12.38,17.25 J1.13
  Route15 0.127: v23.62,27.5 23.12,28 20.12,28 12.5,20.38 v12.5,17.38
SCL  (via drill 0.2)  (1 unrouted)
  Top 0.127: 39.88,13.5 41.25,12.12 41.88,12.12 R4.2 | 39.88,13.5 TP_SCL.TP 39.25,13.5 | 39.88,13.5 v38.38,12 37.75,12 U1.7 | IC3.B1 30.75,16.5 28.5,14.25 26.62,14.25 | 26.62,14.25 24.62,14.25 23.75,13.38 23.75,11.62 24.25,11.62 24.38,11.5 24.38,11.38 | 24.38,11.38 24.38,11.25 R2.1 | 28.12,11.88 28.12,12.38 27.5,12.38 27.12,12.75 26.75,12.75 26.62,12.88 26.62,14.25 | 28.12,11.88 28.12,10.75 28.75,10.12 28.88,10.12 29,10.25 IC4.C1 | 24.38,11.38 24.5,11.38 24.75,11.12 25.25,11.12 IC1.12 | 28.12,11.88 v28.25,11.88
  Route2 0.127: v38.38,12 28.25,12 v28.25,11.88
SDA  (via drill 0.2)  (1 unrouted)
  Top 0.127: R5.2 42.25,8.88 43.88,8.88 44,8.75 TP_SDA.TP 44.12,8.75 44.12,11.25 40.5,14.88 38.62,14.88 38.25,14.5 37.75,14.5 v37.75,13 37.75,12.62 U1.8 | v29,14.12 31,16.12 31.25,16.12 IC3.C1 | v25.38,9.62 25.5,9.75 25.88,9.75 R1.1 25.88,9.88 25.88,10.62 IC1.2 | v21.25,23.12 21.5,23.12 21.75,23.38 U$1.P$L1
  Route15 0.127: v29,14.12 29,13.38 28.38,12.75 | 27.12,11.5 25.38,9.75 v25.38,9.62 | 27.12,11.5 28.38,12.75 | v21.25,23.12 21.25,22.88 20.75,22.38 20.75,17.88 27.12,11.5 | v37.75,13 37.5,12.75 28.38,12.75
SWDCLK  (via drill 0.2)
  Top 0.127: v28.88,20.25 28.25,20.88 U$1.P$AA24 | v38.88,32.12 38.38,32.62 38.38,33.25 TP3.TP
  Bottom 0.127: v28.88,20.25 28.88,22.12 v38.88,32.12
SWDIO  (via drill 0.2)
  Top 0.127: v30.38,19.75 28.5,19.75 28.5,20.12 28.25,20.38 U$1.P$AC24 | v30.75,29.5 30.12,30.12 30.12,30.75 TP4.TP
  Route2 0.127: v30.38,19.75 30.75,20.12 v30.75,29.5
SWO  (via drill 0.2)
  Top 0.127: v27,19.62 27.25,19.88 U$1.P$AD22 | v26.75,16.38 27,16.12 28.38,16.12 TP_SWO.TP
  Route2 0.127: v27,19.62 26.62,19.25 26.62,16.5 v26.75,16.38
VBAT
  Top 0.127: U1.2 35.75,12 35.75,11.62 U1.3 35.62,11.5 34.88,11.5 | C26.1 37.25,10 35.62,10 34.88,10.75 34.88,11.5 | IC3.C2 31.75,16.12 31.88,16 32,16 32.12,16.12 32.5,16.12 32.75,15.88 C37.1 32.88,15.75 32.88,14.88 34.88,14.88 | 34.88,14.88 35.75,14.88 36.62,15.75 37.25,15.75 TP_VBAT.TP | 34.88,14.88 34.88,11.5
VBUS  (via drill 0.2)
  Top 0.127: v18.75,19.75 19.12,19.75 19.5,20.12 21.5,20.12 21.62,20.25 22,20.25 22.25,20 U$1.P$AD2 | v20.38,27.5 20.75,27.88 20.75,28.38 20.62,28.38 J4.A9_B4 20.62,28.5 20.62,28.88 22.38,30.62 24.25,30.62 | IC3.A2 31.75,16.88 31.88,17 32.75,17 C38.1 32.88,17.12 33,17.12 33,17.5 32.62,17.88 32.5,17.88 32.5,19.75 | 32.5,19.75 C21.1 | 24.12,33.25 24.38,33.5 24.88,33.5 25.12,33.75 C30.2 | 24.12,33.25 23.38,33.25 D4.5 | 25.88,30.62 27.88,30.62 v28,30.5 | 25.88,30.62 25.12,29.88 25.12,28.5 25.38,28.5 J4.A4_B9 | C31.2 28.16,31.41 25.88,30.62 | 24.12,33.25 24.12,33 24.25,32.88 24.25,30.62 | 25.88,30.62 24.25,30.62 | v32.38,19.75 32.5,19.75
  Route2 0.127: v32.38,19.75 32,20.12 32,22.62 31.25,23.38 31.25,29.75 30.5,30.5 v28,30.5
  Route15 0.127: v18.75,19.75 18.75,20.5 16.75,22.5 16.75,23.88 v20.38,27.5
VREG  (via drill 0.2)
  Top 0.127: IC2.A3 15.75,11.25 15.75,11 IC2.A2 15.75,10.88 15.75,10.5 IC2.A1 15.62,10.5 15.25,10.12 15.25,9 C23.1 15.12,8.88 15.12,7.62 16.62,7.62 16.88,7.38 17.62,7.38 | v32.12,16.5 IC3.B2 | v32,17.75 31.62,18.12 31.62,18.5 31.75,18.5 C39.1 | 17.62,7.38 17.62,6.88 17.5,6.88 TP7.TP 17.62,7.38 | 17.62,7.38 17.62,8.12 | 17.62,8.12 17.62,8.88 C24.1 | 17.62,8.12 v17.75,8.12
  Route2 0.127: v32,17.75 32,16.62 v32.12,16.5 27.75,12.12 27.75,11.38 27.88,11.25 27.88,10.75 25.25,8.12 v17.75,8.12
(copper drawn outside any net)
  shapes: Bottom area x1